# Altium PCB PCBChamberRTDs.PcbDoc (part 1 of 2)
Units mil, origin at the board's own origin, x right, y up, seen from the top; angles counter-clockwise.
Board outline 6299.21 x 4724.41 mil, 2 copper layers (Top Layer, Bottom Layer); 132 components, 182 nets, 689 pads, 214 vias.
Unrouted connection lines stored in the file: 100.
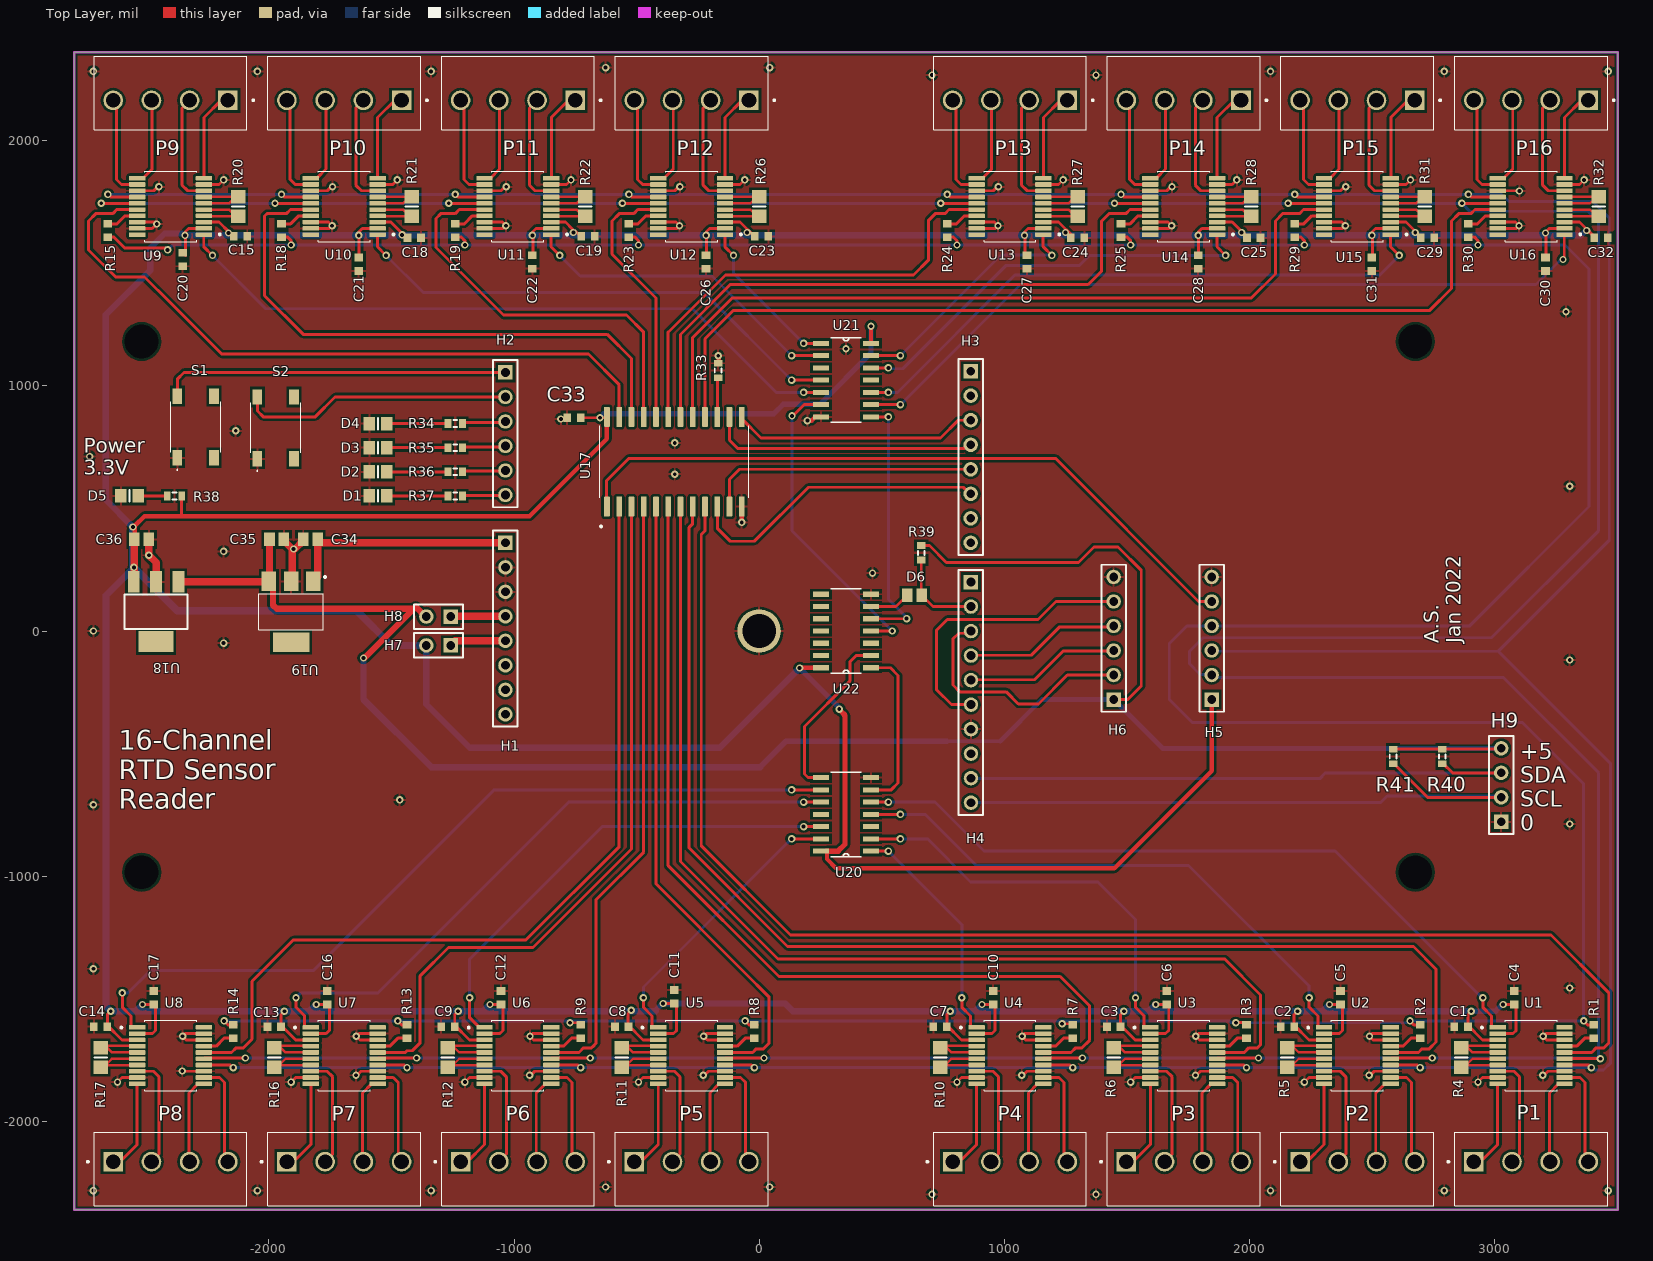
[diagram p0: Top Layer view]
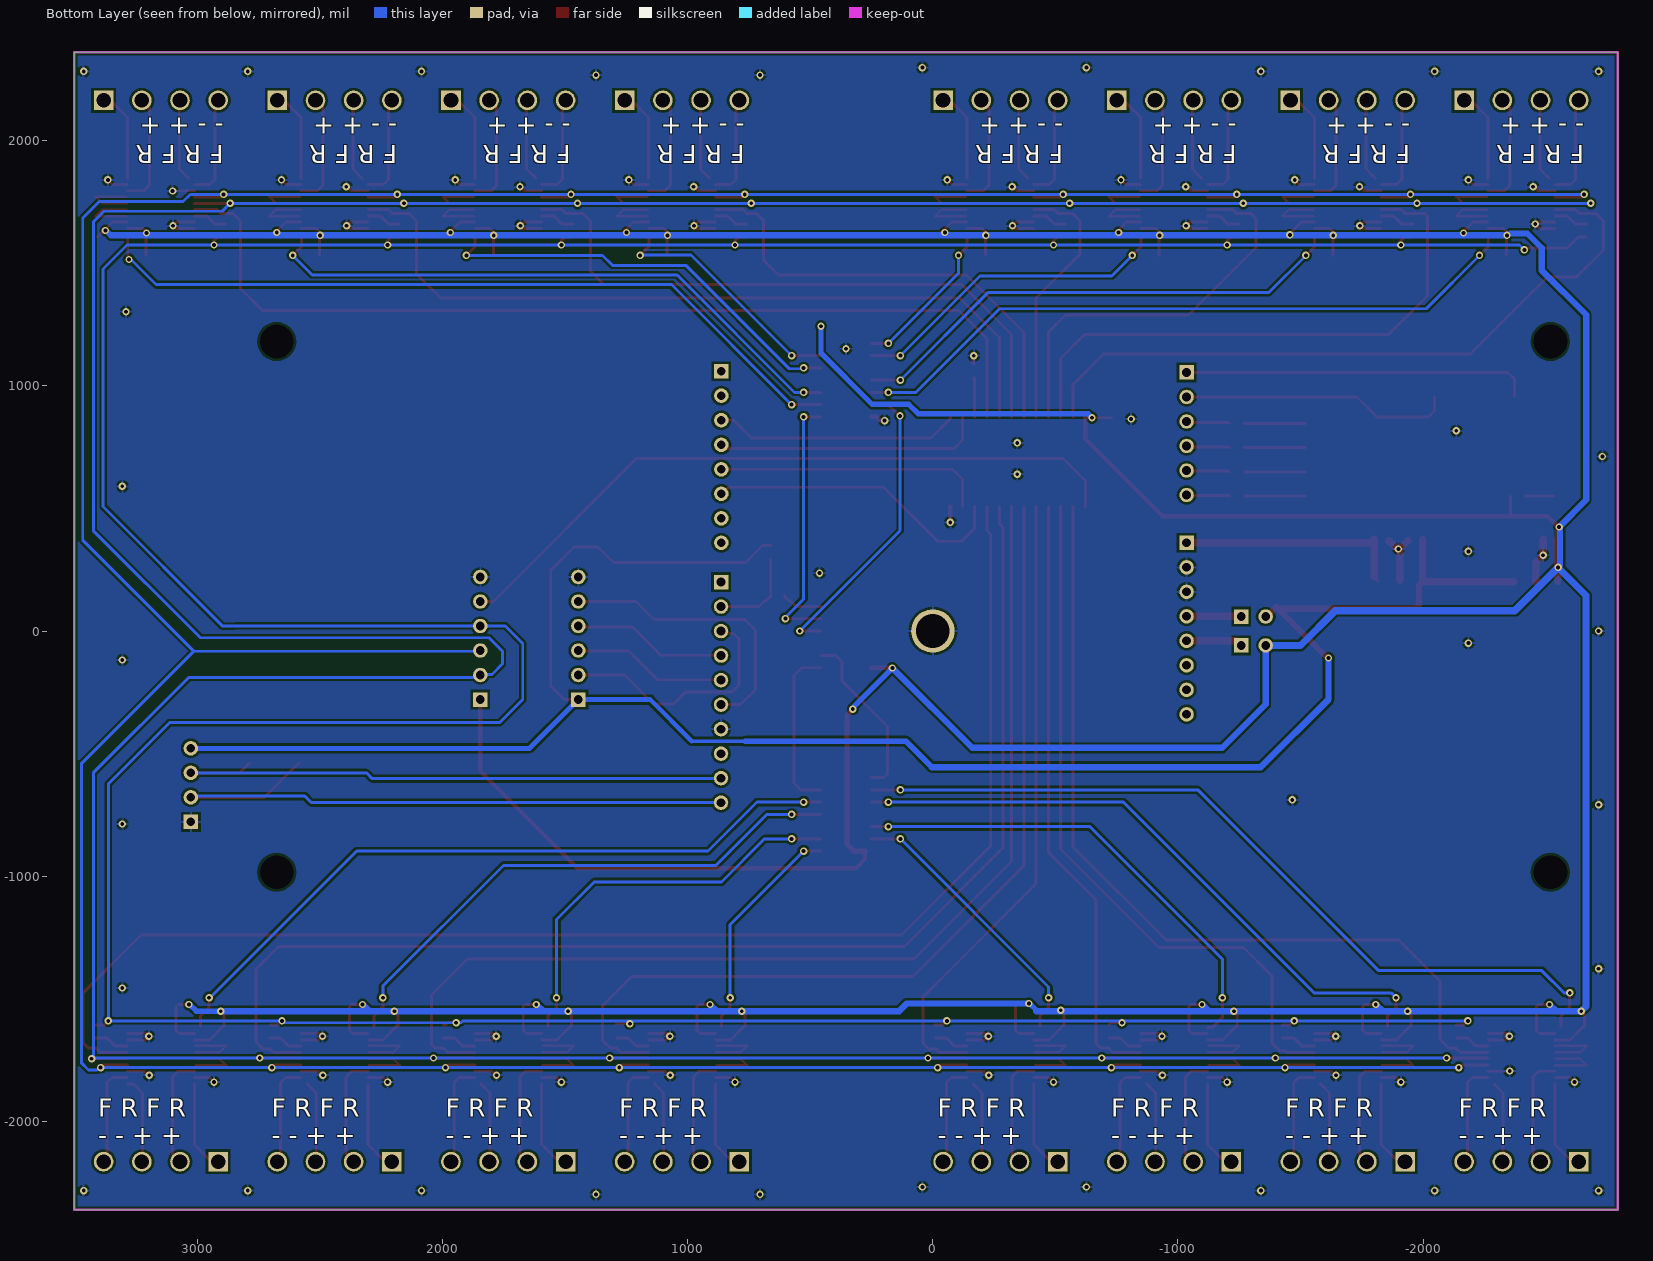
[diagram p1: Bottom Layer view, seen from below]

## Layer stack, top to bottom
Top Solder: solder mask 0.4, Solder Resist, Dk 3.5
Top Layer: signal copper 1.4
Dielectric 1: dielectric 12.6, FR-4, Dk 4.8
Bottom Layer: signal copper 1.4
Bottom Solder: solder mask 0.4, Solder Resist, Dk 3.5

## Board outline
-2795.28,-2362.2 -2795.28,2362.2 3503.94,2362.2 3503.94,-2362.2

## Design rules (kind name [scope] priority, off if disabled: settings)
Clearance [All] p1: gap=10 ignorepadtopadclearanceinfootprint=FALSE except(0: Arc-Hole Track-Hole SMDPad-Hole THPad-Hole Via-Hole Fill-Hole Poly-Hole Region-Hole Text-Hole; 7: Arc-Arc Arc-Track Arc-SMDPad Arc-THPad Track-Track Track-SMDPad Track-THPad SMDPad-SMDPad)
PolygonConnect [All] p1: connectstyle=Relief reliefconductorwidth=10 reliefentries=4 polygonreliefangle="90 Angle" airgapwidth=10
RoutingVias [All] p1: holewidth=28 width=50 viastyle="Through Hole" minholewidth=28 minwidth=50 maxholewidth=28 maxwidth=50
SolderMaskExpansion [All] p1: expansion=4 istentingtop=FALSE
Width [All] p1: maxlimit=30 minlimit=7 preferedwidth=12 minimp=50.000000 maximp=50.000000 favimp=50.000000
30 further rules are at their usual default settings.

## Classes and differential pairs
component class RTDsSheet2: C15 C18 C19 C20 C21 C22 C23 C24 C25 C26 C27 C28 C29 C30 C31 C32 P9 P10 P11 P12 P13 P14 P15 P16 R15 R18 R19 R20 R21 R22 R23 R24 R25 R26 R27 R28 R29 R30 R31 R32 U9 U10 U11 U12 U13 U14 U15 U16 U21
component class RTDsSheet3: C33 C34 C35 C36 D1 D2 D3 D4 D5 D6 H1 H2 H3 H4 H5 H6 H7 H8 H9 R33 R34 R35 R36 R37 R38 R39 R40 R41 S1 S2 U17 U18 U19 U22
component class RTDsSheet1: C1 C2 C3 C4 C5 C6 C7 C8 C9 C10 C11 C12 C13 C14 C16 C17 P1 P2 P3 P4 P5 P6 P7 P8 R1 R2 R3 R4 R5 R6 R7 R8 R9 R10 R11 R12 R13 R14 R16 R17 U1 U2 U3 U4 U5 U6 U7 U8 U20

## Components (designator, comment, footprint, x,y, rotation, side; value= is the part's Value field where it differs from the comment)
C1 "" 1608[0603] 2864.17,-1614.17 r0 top value=0.1uF
C2 "" 1608[0603] 2155.51,-1614.17 r0 top value=0.1uF
C3 "" 1608[0603] 1446.85,-1614.17 r0 top value=0.1uF
C4 "" 1608[0603] 3080.71,-1496.06 r270 top value=0.1uF
C5 "" 1608[0603] 2372.05,-1496.06 r270 top value=0.1uF
C6 "" 1608[0603] 1663.39,-1496.06 r270 top value=0.1uF
C7 "" 1608[0603] 738.19,-1614.17 r0 top value=0.1uF
C8 "" 1608[0603] -561.02,-1614.17 r0 top value=0.1uF
C9 "" 1608[0603] -1269.68,-1614.17 r0 top value=0.1uF
C10 "" 1608[0603] 954.72,-1496.06 r270 top value=0.1uF
C11 "" 1608[0603] -346.46,-1492.13 r270 top value=0.1uF
C12 "" 1608[0603] -1053.15,-1496.06 r270 top value=0.1uF
C13 "" 1608[0603] -1978.35,-1614.17 r0 top value=0.1uF
C14 "" 1608[0603] -2687.01,-1614.17 r0 top value=0.1uF
C15 "" 1608[0603] -2116.14,1610.07 r180 top value=0.1uF
C16 "" 1608[0603] -1761.81,-1496.06 r270 top value=0.1uF
C17 "" 1608[0603] -2470.47,-1496.06 r270 top value=0.1uF
C18 "" 1608[0603] -1407.48,1604.33 r180 top value=0.1uF
C19 "" 1608[0603] -698.82,1610.07 r180 top value=0.1uF
C20 "" 1608[0603] -2352.36,1515.75 r90 top value=0.1uF
C21 "" 1608[0603] -1633.86,1496.06 r90 top value=0.1uF
C22 "" 1608[0603] -925.2,1505.91 r90 top value=0.1uF
C23 "" 1608[0603] 9.84,1610.07 r180 top value=0.1uF
C24 "" 1608[0603] 1299.21,1604.33 r180 top value=0.1uF
C25 "" 1608[0603] 2017.72,1604.33 r180 top value=0.1uF
C26 "" 1608[0603] -216.54,1505.91 r90 top value=0.1uF
C27 "" 1608[0603] 1092.52,1505.91 r90 top value=0.1uF
C28 "" 1608[0603] 1791.34,1505.91 r90 top value=0.1uF
C29 "" 1608[0603] 2726.38,1604.33 r180 top value=0.1uF
C30 "" 1608[0603] 3208.66,1496.06 r90 top value=0.1uF
C31 "" 1608[0603] 2500,1496.06 r90 top value=0.1uF
C32 "" 1608[0603] 3435.04,1604.33 r180 top value=0.1uF
C33 "" 1608[0603] -755.91,870.08 r180 top value=0.1uF
C34 "" C0805 -1830.71,374.02 r0 top value=4.7uF
C35 "" C0805 -1968.5,374.02 r180 top value=4.7uF
C36 "" C0805 -2519.68,374.02 r180 top value=4.7uF
D1 "" 6-0805_N -1555.12,551.18 r180 top
D2 "" 6-0805_N -1555.12,649.61 r180 top
D3 "" 6-0805_N -1555.12,748.03 r180 top
D4 "" 6-0805_N -1555.12,846.46 r180 top
D5 "" 6-0805_N -2568.9,551.18 r180 top
D6 "Diode 1N4001" C0805 633.86,145.67 r0 top
H1 "Header 8" HDR1X8 -1035.24,359.96 r270 top
H2 "PA1" HDR1X6 -1035.24,1054.95 r270 top
H3 "Header 8" HDR1X8 863.31,1059.95 r270 top
H4 "Header 10" HDR1X10 864.17,199.8 r270 top
H5 "PA1" HDR1X6 1846.5,-279.53 r90 top locked
H6 "PA1" HDR1X6 1446.5,-279.53 r90 top locked
H7 "" HDR1X2 -1258.27,-58.83 r180 top
H8 "" HDR1X2 -1258.27,59.06 r180 top
H9 "" HDR1X4 3027.56,-778.74 r90 top
P1 "OSTTE020104" TE_3-641209-4 3149.61,-2165.35 r180 top
P2 "OSTTE020104" TE_3-641209-4 2440.95,-2165.35 r180 top
P3 "OSTTE020104" TE_3-641209-4 1732.28,-2165.35 r180 top
P4 "OSTTE020104" TE_3-641209-4 1023.62,-2165.35 r180 top
P5 "OSTTE020104" TE_3-641209-4 -275.59,-2165.35 r180 top
P6 "OSTTE020104" TE_3-641209-4 -984.25,-2165.35 r180 top
P7 "OSTTE020104" TE_3-641209-4 -1692.91,-2165.35 r180 top
P8 "OSTTE020104" TE_3-641209-4 -2401.57,-2165.35 r180 top
P9 "OSTTE020104" TE_3-641209-4 -2401.57,2165.35 r0 top
P10 "OSTTE020104" TE_3-641209-4 -1692.91,2165.35 r0 top
P11 "OSTTE020104" TE_3-641209-4 -984.25,2165.35 r0 top
P12 "OSTTE020104" TE_3-641209-4 -275.59,2165.35 r0 top
P13 "OSTTE020104" TE_3-641209-4 1023.62,2165.35 r0 top
P14 "OSTTE020104" TE_3-641209-4 1732.28,2165.35 r0 top
P15 "OSTTE020104" TE_3-641209-4 2440.95,2165.35 r0 top
P16 "OSTTE020104" TE_3-641209-4 3149.61,2165.35 r0 top
R1 "" 1608[0603] 3405.51,-1633.86 r90 top value=100R
R2 "" 1608[0603] 2696.85,-1633.86 r90 top value=100R
R3 "" 1608[0603] 1988.19,-1633.86 r90 top value=100R
R4 "" 6-0805_M 2864.17,-1740.16 r90 top value="400 Ohm"
R5 "" 6-0805_M 2155.51,-1740.16 r90 top value="400 Ohm"
R6 "" 6-0805_M 1446.85,-1740.16 r90 top value="400 Ohm"
R7 "" 1608[0603] 1279.53,-1633.86 r90 top value=100R
R8 "" 1608[0603] -19.68,-1633.86 r90 top value=100R
R9 "" 1608[0603] -728.35,-1633.86 r90 top value=100R
R10 "" 6-0805_M 738.19,-1740.16 r90 top value="400 Ohm"
R11 "" 6-0805_M -561.02,-1740.16 r90 top value="400 Ohm"
R12 "" 6-0805_M -1269.68,-1740.16 r90 top value="400 Ohm"
R13 "" 1608[0603] -1437.01,-1633.86 r90 top value=100R
R14 "" 1608[0603] -2145.67,-1633.86 r90 top value=100R
R15 "" 1608[0603] -2657.48,1633.86 r270 top value=100R
R16 "" 6-0805_M -1978.35,-1740.16 r90 top value="400 Ohm"
R17 "" 6-0805_M -2687.01,-1740.16 r90 top value="400 Ohm"
R18 "" 1608[0603] -1948.82,1633.86 r270 top value=100R
R19 "" 1608[0603] -1240.16,1633.86 r270 top value=100R
R20 "" 6-0805_M -2125.98,1732.28 r270 top value="400 Ohm"
R21 "" 6-0805_M -1417.32,1732.28 r270 top value="400 Ohm"
R22 "" 6-0805_M -708.66,1732.28 r270 top value="400 Ohm"
R23 "" 1608[0603] -531.5,1633.86 r270 top value=100R
R24 "" 1608[0603] 767.72,1633.86 r270 top value=100R
R25 "" 1608[0603] 1476.38,1633.86 r270 top value=100R
R26 "" 6-0805_M 0,1732.28 r270 top value="400 Ohm"
R27 "" 6-0805_M 1299.21,1732.28 r270 top value="400 Ohm"
R28 "" 6-0805_M 2007.87,1732.28 r270 top value="400 Ohm"
R29 "" 1608[0603] 2185.04,1633.86 r270 top value=100R
R30 "" 1608[0603] 2893.7,1633.86 r270 top value=100R
R31 "" 6-0805_M 2716.54,1732.28 r270 top value="400 Ohm"
R32 "" 6-0805_M 3425.2,1732.28 r270 top value="400 Ohm"
R33 "" J1-0603 -167.32,1062.99 r90 top value=100R
R34 "" J1-0603 -1240.16,846.46 r180 top value=100R
R35 "" J1-0603 -1240.16,748.03 r180 top value=100R
R36 "" J1-0603 -1240.16,649.61 r180 top value=100R
R37 "" J1-0603 -1240.16,551.18 r180 top value=100R
R38 "" J1-0603 -2385.83,551.18 r180 top value=100R
R39 "" J1-0603 661.42,318.9 r270 top value=4.7K
R40 "" J1-0603 2787.4,-511.81 r270 top value=4.7K
R41 "" J1-0603 2586.61,-511.81 r270 top value=4.7K
S1 "" PTS525SM08SMTR2LFS -2299.21,807.09 r90 top
S2 "" PTS525SM08SMTR2LFS -1972.44,803.15 r90 top
U1 "MAX31865AAP" SOP65P777X199-20N 3149.61,-1732.28 r0 top
U2 "MAX31865AAP" SOP65P777X199-20N 2440.95,-1732.28 r0 top
U3 "MAX31865AAP" SOP65P777X199-20N 1732.28,-1732.28 r0 top
U4 "MAX31865AAP" SOP65P777X199-20N 1023.62,-1732.28 r0 top
U5 "MAX31865AAP" SOP65P777X199-20N -275.59,-1732.28 r0 top
U6 "MAX31865AAP" SOP65P777X199-20N -984.25,-1732.28 r0 top
U7 "MAX31865AAP" SOP65P777X199-20N -1692.91,-1732.28 r0 top
U8 "MAX31865AAP" SOP65P777X199-20N -2401.57,-1732.28 r0 top
U9 "MAX31865AAP" SOP65P777X199-20N -2401.57,1732.28 r180 top
U10 "MAX31865AAP" SOP65P777X199-20N -1692.91,1732.28 r180 top
U11 "MAX31865AAP" SOP65P777X199-20N -984.25,1732.28 r180 top
U12 "MAX31865AAP" SOP65P777X199-20N -275.59,1732.28 r180 top
U13 "MAX31865AAP" SOP65P777X199-20N 1023.62,1732.28 r180 top
U14 "MAX31865AAP" SOP65P777X199-20N 1732.28,1732.28 r180 top
U15 "MAX31865AAP" SOP65P777X199-20N 2440.95,1732.28 r180 top
U16 "MAX31865AAP" SOP65P777X199-20N 3149.61,1732.28 r180 top
U17 "CD74HC4067M96" SOIC127P1030X265-24N -346.26,690.55 r90 top
U18 "AP2114H-3.3TRG1" SOT230P700X180-4N#1 -2460.63,78.74 r180 top
U19 "LT1129IST-5#PBF" SOT230P700X180-4N#2 -1909.45,78.74 r180 top
U20 "74HC21D,653" SOIC127P600X175-14N 354.33,-748.03 r180 top
U21 "74HC21D,653" SOIC127P600X175-14N 354.33,1023.62 r0 top
U22 "74HC21D,653" SOIC127P600X175-14N 354.33,0 r180 top

## Footprints (in the part's own frame and the unit in brackets; to place one, negate y for a bottom-side part, rotate by r counter-clockwise, add the part's x,y. Pads: shape width x height; smd on the part's side, far side on the other; paste and mask are expansions set on the pad)
6-0805_M [mm] "Chip Resistor, Body 2.0x1.2mm, IPC Low Density"
  rect 1.4x1.5 smd: 1(-1,0) 2(1,0)
  silkscreen extent 0,-0.65 0,0.65, body extent -1.07,-0.7 1.07,0.7, height 0.7
6-0805_N [mm] "Chip Resistor, Body 2.0x1.2mm, IPC Medium Density"
  rect 1.2x1.4 smd: 1(-0.9,0) 2(0.9,0)
  silkscreen extent 0,-0.6 0,0.6, body extent -1.07,-0.7 1.07,0.7, height 0.7
1608[0603] [mm] "Chip Capacitor, Body 1.6x0.8mm, IPC High Density"
  rect 0.8x0.9 smd: 1(-0.7,0) 2(0.7,0)
  body extent -0.87,-0.48 0.87,0.48, height 1.3
C0805 [mm] "Chip Capacitor, Body 2.0x1.3mm, IPC High Density"
  rect 1.1x1.4 smd: 1(-0.75,0) 2(0.75,0)
  body extent -1.1,-0.72 1.1,0.72, height 1.4
HDR1X2 [mm] "Connector; Header; 2 Position"
  rect 1.5x1.5 hole 0.9: 1(0,0)
  round 1.5 hole 0.9: 2(2.54,0)
  silkscreen extent -1.27,-1.27 3.81,1.27
HDR1X4 [mm] "Connector; Header; 4 Position"
  rect 1.5x1.5 hole 0.9: 1(0,0)
  round 1.5 hole 0.9: 2(2.54,0) 3(5.08,0) 4(7.62,0)
  silkscreen extent -1.27,-1.27 8.89,1.27
HDR1X6 [mm] "Connector; Header; 6 Position"
  rect 1.5x1.5 hole 0.9: 1(0,0)
  round 1.5 hole 0.9: 2(2.54,0) 3(5.08,0) 4(7.62,0) 5(10.16,0) 6(12.7,0)
  silkscreen extent -1.27,-1.27 13.97,1.27
HDR1X8 [mm] "Connector; Header; 8 Position"
  rect 1.5x1.5 hole 0.9: 1(0,0)
  round 1.5 hole 0.9: 2(2.54,0) 3(5.08,0) 4(7.62,0) 5(10.16,0) 6(12.7,0) 7(15.24,0) 8(17.78,0)
  silkscreen extent -1.27,-1.27 19.05,1.27
HDR1X10 [mm] "Connector; Header; 10 Position"
  rect 1.5x1.5 hole 0.9: 1(0,0)
  round 1.5 hole 0.9: 2(2.54,0) 3(5.08,0) 4(7.62,0) 5(10.16,0) 6(12.7,0) 7(15.24,0) 8(17.78,0) 9(20.32,0) 10(22.86,0)
  silkscreen extent -1.27,-1.27 24.13,1.27
J1-0603 [mm] "Chip Resistor, Body 1.6x0.8mm, IPC High Density"
  rect 0.7x0.9 smd: 1(-0.75,0) 2(0.75,0)
  silkscreen extent -0.2,-0.35 0.2,0.35, body extent -0.85,-0.48 0.85,0.48, height 0.9
PTS525SM08SMTR2LFS [mm]
  rect 1.6x1 smd: 1(-2.55,1.9) 2(3.85,1.9) 3(-2.55,-1.9) 4(3.85,-1.9)
  silkscreen extent -3.85,-2.6 3.25,2.6
SOIC127P600X175-14N [mil]
  rect 67x21 smd: 1(-102,150) 2(-102,100) 3(-102,50) 4(-102,0) 5(-102,-50) 6(-102,-100) 7(-102,-150) 8(102,-150) 9(102,-100) 10(102,-50) 11(102,0) 12(102,50) 13(102,100) 14(102,150)
  silkscreen extent -63,-172 63,172
SOIC127P1030X265-24N [mm]
  rrect25% 2.06x0.6 smd: 1(-4.64,6.985) 2(-4.64,5.715) 3(-4.64,4.445) 4(-4.64,3.175) 5(-4.64,1.905) 6(-4.64,0.635) 7(-4.64,-0.635) 8(-4.64,-1.905) 9(-4.64,-3.175) 10(-4.64,-4.445) 11(-4.64,-5.715) 12(-4.64,-6.985) 13(4.64,-6.985) 14(4.64,-5.715) 15(4.64,-4.445) 16(4.64,-3.175) 17(4.64,-1.905) 18(4.64,-0.635) 19(4.64,0.635) 20(4.64,1.905) 21(4.64,3.175) 22(4.64,4.445) 23(4.64,5.715) 24(4.64,6.985)
  silkscreen extent -6.8,-7.7 3.75,7.7, body extent -5.15,-7.7 5.15,7.7, height 2.65
SOP65P777X199-20N [mm]
  rrect25% 1.7x0.48 smd: 1(-3.46,2.925) 2(-3.46,2.275) 3(-3.46,1.625) 4(-3.46,0.975) 5(-3.46,0.325) 6(-3.46,-0.325) 7(-3.46,-0.975) 8(-3.46,-1.625) 9(-3.46,-2.275) 10(-3.46,-2.925) 11(3.46,-2.925) 12(3.46,-2.275) 13(3.46,-1.625) 14(3.46,-0.975) 15(3.46,-0.325) 16(3.46,0.325) 17(3.46,0.975) 18(3.46,1.625) 19(3.46,2.275) 20(3.46,2.925)
  silkscreen extent -5.2,-3.67 2.69,3.67, body extent -3.89,-3.6 3.89,3.6, height 1.99
SOT230P700X180-4N#1 [mil]
  rect 48x88 smd: 1(-91,-122) 2(0,-122) 3(91,-122)
  rect 141.73x86.61 smd: 4(0,122.01)
  silkscreen extent -129,-70 129,70
SOT230P700X180-4N#2 [mil]
  rect 59.06x78.74 smd: 1(-90.55,-124.02) 2(0,-124.02) 3(90.55,-124.02)
  rect 149.61x78.74 smd: 4(0,124.02)
  silkscreen extent -142,-146 132,73, body extent -128,-138 128,138, height 71
TE_3-641209-4 [mil]
  round 80 hole 59.84: 1(-233.86,0) 2(-77.95,0) 3(77.95,0)
  rect 80x80 hole 59.84: 4(233.86,0)
  silkscreen extent -312,-120 341,180

## Part data
C1 C2 C3 C4 C5 C6 C7 C8 C9 C10 C11 C12 C13 C14 C15 C16 C17 C18 C19 C20 C21 C22 C23 C24 C25 C26 C27 C28 C29 C30 C31 C32 C33 C34 C35 C36: library part "Cap Semi", "Capacitor (Semiconductor SIM Model)", LatestRevisionDate=29-May-2009, LatestRevisionNote="IPC-7351 Footprint Added.", PackageDescription="Chip Capacitor", PackageReference=C1206, Published=8-Jun-2000, Publisher="Altium Limited"
D1 D2 D3 D4 D5: library part LED3, "Typical BLUE SiC LED", DatasheetVersion=16-Apr-2002, LatestRevisionDate=17-Dec-2003, LatestRevisionNote="PCB Footprint replaced.", PackageDescription="SM LED; 2 C-Bend Leads; Body 3.5 x 2.8 x 1.9 mm, inc leads (LxWxH typ)", PackageReference=3.5X2.8X1.9, PackageVersion=16-Apr-2002, Published=8-Jun-2000, Publisher="Altium Limited"
D6: "1 Amp General Purpose Rectifier", Code_JEDEC=DO-204-AL, ComponentLink1Description="Manufacturer Link", ComponentLink1URL=http://www.fairchildsemi.com/, ComponentLink2Description=Datasheet, ComponentLink2URL=http://www.fairchildsemi.com/ds/1N%2F1N4001.pdf, DatasheetVersion=1998, LatestRevisionDate=17-Jul-2002, LatestRevisionNote="Re-released for DXP Platform.", PackageDescription="Diode, Axial; Body 5.2 x 2.7 mm (LxDia. max), Lead Dia. 0.86 mm (max)", PackageReference=DO-41, PackageVersion=Aug-1999, Published=8-Jun-2000, Publisher="Altium Limited"
H1 H3: "Header, 8-Pin", LatestRevisionDate=17-Jul-2002, LatestRevisionNote="Re-released for DXP Platform.", Publisher="Altium Limited"
H2 H5 H6: library part "Header 6", "Header, 6-Pin", LatestRevisionDate=17-Jul-2002, LatestRevisionNote="Re-released for DXP Platform.", Publisher="Altium Limited"
H4: "Header, 10-Pin", LatestRevisionDate=17-Jul-2002, LatestRevisionNote="Re-released for DXP Platform.", Publisher="Altium Limited"
H7 H8: library part "Header 2", "Header, 2-Pin", LatestRevisionDate=17-Jul-2002, LatestRevisionNote="Re-released for DXP Platform.", Publisher="Altium Limited"
H9: library part "Header 4", "Header, 4-Pin", LatestRevisionDate=17-Jul-2002, LatestRevisionNote="Re-released for DXP Platform.", Publisher="Altium Limited"
P1 P2 P3 P4 P5 P6 P7 P8 P9 P10 P11 P12 P13 P14 P15 P16: "Terminal Block 3.5mm 2pos Pcb", Package=None, Availability=Unavailable, MF="{'manufacturer': u'On Shore'}", MP=OSTTE020104, Price=None
R1 R2 R3 R4 R5 R6 R7 R8 R9 R10 R11 R12 R13 R14 R15 R16 R17 R18 R19 R20 R21 R22 R23 R24 R25 R26 R27 R28 R29 R30 R31 R32: library part "Res Semi", "Semiconductor Resistor", LatestRevisionDate=17-Jul-2002, LatestRevisionNote="Re-released for DXP Platform.", PackageDescription="Axial Device, Thru-Hole; 2 Leads; 0.5 in Pin Spacing", PackageReference=AXIAL-0.5, Published=8-Jun-2000, Publisher="Altium Limited"
R33 R34 R35 R36 R37 R38 R39 R40 R41: library part Res3, "Resistor", LatestRevisionDate=29-May-2009, LatestRevisionNote="IPC-7351 Footprint Added.", PackageDescription="Chip Resistor", PackageReference=J1-0603, Published=8-Jun-2000, Publisher="Altium Limited"
S1 S2: library part SW-PB, "Switch", LatestRevisionDate=17-Jul-2002, LatestRevisionNote="Re-released for DXP Platform.", PackageDescription="Switch; 2 Leads", PackageReference=SPST-2, Published=24-Mar-1999, Publisher="Altium Limited"
U1 U2 U3 U4 U5 U6 U7 U8 U9 U10 U11 U12 U13 U14 U15 U16: "Rtd To Digital Converter In Ssop Tr", Package=None, Availability=Unavailable, MF="{'manufacturer': u'Maxim Integrated'}", MP=MAX31865AAP, Price=None
U17 U18 U19: Package=None, Availability=Unavailable, Price=None
  U17: MF="{'manufacturer': u'Texas Instruments'}", MP=CD74HC4067M96
  U18: MF="{'manufacturer': u'Diodes Inc.'}", MP=AP2114H-3.3TRG1
  U19: MF="{'manufacturer': u'Analog Devices'}", MP=LT1129IST-5#PBF
U20 U21 U22: "Dual 4-input AND gate", Package=None, Availability=Unavailable, MF="{'manufacturer': u'Nexperia USA'}", MP=74HC21D,653, Price=None

## Free pads (board coordinates)
  round 0 hole 137.8: 10(-2519.68,-984.25) 10(-2519.68,1181.1) 10(2677.17,-984.25) 10(2677.17,1181.1)
  round 177.17 hole 137.8: 10(0,0)

## Via types
v1: diameter 30, hole 15.75, Top Layer to Bottom Layer, tented both sides, 214 vias

## Nets (pads, with @x,y where several pads share a name; then routed paths per layer and width w, separated by ;. In a path a pad name is that pad's centre, name@x,y a point inside that pad or via, vN(x,y) a via of type N, cw(c..) or ccw(c..) an arc to the next point about the centre after c; other vN are vias at no path point)
ARD_V3.3: H1.5 H7.1 | length 230.8
  Top Layer w12: H7.1@-1258.27,-58.83 H7.1@-1239.48,-40.04
  Top Layer w30: H7.1@-1239.48,-40.04 H1.5@-1035.24,-40.04
ARD_VDD: H1.4 H8.1 | length 223.4
  Top Layer w12: H8.1@-1258.27,59.06 H8.1@-1257.36,59.96
  Top Layer w30: H8.1@-1257.36,59.96 H1.4@-1035.24,59.96
ARD_VIN: C34.2 H1.1 U19.1 | length 950.4
  Top Layer w12: U19.1@-1818.9,202.76 U19.1@-1801.18,220.47 ; C34.2@-1801.18,374.02 C34.2@-1787.13,359.96
  Top Layer w30: U19.1@-1801.18,220.47 C34.2@-1801.18,374.02 ; C34.2@-1787.13,359.96 H1.1@-1035.24,359.96
CS: H5.5 U17.1 | length 2854.7
  Top Layer w12: U17.1@-621.26,507.87 -622.05,508.66 -622.05,614.17 -531.5,704.72 1208.66,704.72 1792.91,120.47 H5.5@1846.5,120.47
CS-0: U1.16 U17.9 | length 5742.8
  Top Layer w12: U17.9@-221.26,507.87 -221.26,408.66 -236.22,393.7 -236.22,-875.98 127.95,-1240.16 3230.32,-1240.16 3466.54,-1476.38 3466.54,-1681.1 3446.85,-1700.79 3415.35,-1700.79 3396.65,-1719.49 U1.16@3285.83,-1719.49
CS-1: U2.16 U17.8 | length 5150.9
  Top Layer w12: U17.8@-271.26,507.87 -271.26,437.4 -285.43,423.23 -285.43,-885.83 116.14,-1287.4 2669.29,-1287.4 2761.81,-1379.92 2761.81,-1677.17 2734.25,-1704.72 2704.72,-1704.72 2689.96,-1719.49 U2.16@2577.17,-1719.49
CS-2: U3.16 U17.7 | length 4434.7
  Top Layer w12: U17.7@-321.26,507.87 -321.26,-940.55 76.77,-1338.58 1899.65,-1338.58 2045.78,-1484.71 2045.78,-1688.48 2033.46,-1700.79 1998.03,-1700.79 1979.33,-1719.49 U3.16@1868.5,-1719.49
CS-3: U4.16 U17.6 | length 3771.1
  Top Layer w12: U17.6@-371.26,507.87 -371.26,-957.48 80.71,-1409.45 1228.35,-1409.45 1348.43,-1529.53 1348.43,-1669.29 1316.93,-1700.79 1291.34,-1700.79 1272.64,-1719.49 U4.16@1159.84,-1719.49
CS-4: U5.16 U17.5 | length 2575.6
  Top Layer w12: U17.5@-421.26,507.87 -421.26,-1031.5 -61.6,-1391.16 39.37,-1492.13 39.37,-1683.07 17.72,-1704.72 -11.81,-1704.72 -26.57,-1719.49 U5.16@-139.37,-1719.49
CS-5: U6.16 U17.4 | length 2468.4
  Top Layer w12: U6.16@-848.03,-1719.49 -735.24,-1719.49 -716.53,-1700.79 -684.19,-1700.79 -677.17,-1693.76 -665.35,-1681.95 -665.35,-1096.46 -471.26,-902.36 U17.4@-471.26,507.87
CS-6: U7.16 U17.3 | length 2936.7
  Top Layer w12: U7.16@-1556.69,-1719.49 -1443.9,-1719.49 -1437.01,-1712.6 -1415.49,-1712.6 -1383.1,-1680.21 -1383.1,-1406.73 -1267.72,-1291.34 -923.23,-1291.34 -521.26,-889.37 U17.3@-521.26,507.87
CS-7: U8.16 U17.2 | length 3568.3
  Top Layer w12: U8.16@-2265.35,-1719.49 -2152.56,-1719.49 -2133.86,-1700.79 -2104.33,-1700.79 -2068.9,-1665.35 -2068.9,-1429.13 -1899.61,-1259.84 -950.79,-1259.84 -571.26,-880.31 U17.2@-571.26,507.87
CS-8: U9.16 U17.23 | length 2859.9
  Top Layer w12: U9.16@-2537.8,1719.49 -2621.06,1719.49 -2637.8,1702.76 -2706.69,1702.76 -2736.22,1673.23 -2736.22,1555.12 -2625.49,1444.39 -2507.38,1444.39 -2404.04,1341.04 -2192.91,1129.92 -696.85,1129.92 -571.26,1004.33 U17.23@-571.26,873.23
CS-9: U10.16 U17.22 | length 2365.6
  Top Layer w12: U10.16@-1829.13,1719.49 -1912.4,1719.49 -1929.13,1702.76 -2007.87,1702.76 -2017.72,1692.91 -2017.72,1368.11 -1860.24,1210.63 -620.08,1210.63 -521.26,1111.81 U17.22@-521.26,873.23
CS-10: U11.16 U17.21 | length 1668.5
  Top Layer w12: U11.16@-1120.47,1719.49 -1223.42,1719.49 -1240.16,1702.76 -1299.21,1702.76 -1318.9,1683.07 -1318.9,1564.96 -1043.31,1289.37 -541.34,1289.37 -471.26,1219.29 U17.21@-471.26,873.23
CS-11: U12.16 U17.20 | length 1081.9
  Top Layer w12: U17.20@-421.26,873.23 -421.26,1358.27 -600.39,1537.4 -600.39,1673.23 -570.87,1702.76 -511.81,1702.76 -495.08,1719.49 U12.16@-411.81,1719.49
CS-12: U13.16 U17.19 | length 1906
  Top Layer w12: U17.19@-371.26,873.23 -371.26,1220.47 ; -370.08,1220.47 -137.8,1452.76 629.92,1452.76 691.73,1514.57 691.73,1675.98 718.5,1702.76 757.87,1702.76 774.61,1719.49 U13.16@887.4,1719.49
CS-13: U14.16 U17.18 | length 2585.2
  Top Layer w12: U17.18@-321.26,873.23 -321.26,1210.24 -118.11,1413.39 1342.52,1413.39 1397.64,1468.5 1397.64,1673.23 1427.17,1702.76 1496.06,1702.76 1512.8,1719.49 U14.16@1596.06,1719.49
CS-14: U15.16 U17.17 | length 3243.2
  Top Layer w12: U17.17@-271.26,873.23 -271.26,1197.24 -110.24,1358.27 2007.87,1358.27 2106.3,1456.69 2106.3,1673.23 2135.83,1702.76 2204.72,1702.76 2221.46,1719.49 U15.16@2304.72,1719.49
CS-15: U16.16 U17.16 | length 3933.4
  Top Layer w12: U17.16@-221.26,873.23 -221.26,1192.13 -106.3,1307.09 2734.25,1307.09 2824.8,1397.64 2824.8,1673.23 2854.33,1702.76 2903.54,1702.76 2920.28,1719.49 U16.16@3013.39,1719.49
CS-H: H4.6 H6.5 | length 1179.1
  Top Layer w12: H4.6@864.17,-300.2 784.45,-300.2 724.41,-240.16 724.41,3.94 767.72,47.24 1137.8,47.24 1211.02,120.47 H6.5@1446.5,120.47
DRDY: D6.2 H4.2 R39.2 | length 367.8
  Top Layer w12: R39.2@661.42,289.37 661.42,141.73 679.04,124.11 684.95,124.11 709.25,99.8 H4.2@864.17,99.8
DRDY-0: U1.1 U20.5 | length 2959.4
  Top Layer w12: U20.5@456.33,-698.03 v1(527.17,-698.03) v1@527.56,-697.64 ; v1(2952.76,-1496.06) 2952.76,-1535.43 2988.28,-1570.96 U1.1@2988.28,-1613.68
  Bottom Layer w12: v1(527.17,-698.03) 717.72,-698.03 917.32,-897.64 2350.39,-897.64 v1@2951.3,-1498.55
DRDY-0-3: U20.6 U22.1 | length 684.9
  Top Layer w12: U20.6@456.33,-648.03 539.37,-648.03 566.93,-620.47 566.93,-181.1 535.83,-150 U22.1@456.33,-150
DRDY-1: U2.1 U20.4 | length 2261
  Top Layer w12: U20.4@456.33,-748.03 v1(576.38,-748.03) v1@578.74,-750.39 ; v1(2244.09,-1496.06) 2244.09,-1535.43 2279.62,-1570.96 U2.1@2279.62,-1613.68
  Bottom Layer w12: v1(576.38,-748.03) 677.17,-748.03 885.83,-956.69 1751.97,-956.69 2244.09,-1448.82 v1(2244.09,-1496.06)
DRDY-2: U3.1 U20.2 | length 1670
  Top Layer w12: U20.2@456.33,-848.03 v1(576.38,-848.03) v1@578.74,-850.39 ; v1(1535.43,-1496.06) 1535.43,-1535.43 1570.96,-1570.96 U3.1@1570.96,-1613.68
  Bottom Layer w12: v1(576.38,-848.03) 686.61,-848.03 862.2,-1023.62 1381.89,-1023.62 1535.43,-1177.17 v1(1535.43,-1496.06)
DRDY-3: U4.1 U20.1 | length 925.9
  Top Layer w12: U20.1@456.33,-898.03 v1(527.17,-898.03) v1@527.56,-897.64 ; v1(826.77,-1496.06) 826.77,-1535.43 862.3,-1570.96 U4.1@862.3,-1613.68
  Bottom Layer w12: v1(527.17,-898.03) 826.77,-1197.64 v1(826.77,-1496.06)
DRDY-4: U5.1 U20.13 | length 1154.2
  Top Layer w12: v1(-472.44,-1496.06) -472.44,-1535.43 -436.91,-1570.96 U5.1@-436.91,-1613.68 ; v1@129.92,-845.67 v1(132.28,-848.03) U20.13@252.33,-848.03
  Bottom Layer w12: v1(-472.44,-1496.06) -472.44,-1452.76 v1(132.28,-848.03)
DRDY-4-7: U20.8 U22.2 | length 704.7
  Top Layer w12: U20.8@252.33,-598.03 199.16,-598.03 185.04,-583.92 185.04,-389.76 370.08,-204.72 370.08,-125.98 396.06,-100 U22.2@456.33,-100
DRDY-5: U6.1 U20.12 | length 1974.2
  Top Layer w12: v1(-1181.1,-1496.06) -1181.1,-1578.15 -1142.13,-1617.13 U6.1@-1120.47,-1617.13 ; v1@181.1,-798.43 v1(181.5,-798.03) U20.12@252.33,-798.03
  Bottom Layer w12: v1(-1181.1,-1496.06) -1181.1,-1338.58 -640.55,-798.03 v1(181.5,-798.03)
DRDY-6: U7.1 U20.10 | length 2605.5
  Top Layer w12: v1(-1889.76,-1496.06) -1889.76,-1535.43 -1854.24,-1570.96 U7.1@-1854.24,-1613.68 ; v1@181.1,-698.43 v1(181.5,-698.03) U20.10@252.33,-698.03
  Bottom Layer w12: v1(-1889.76,-1496.06) -1870.08,-1476.38 -1555.12,-1476.38 -776.77,-698.03 v1(181.5,-698.03)
DRDY-7: U8.1 U20.9 | length 3349.2
  Top Layer w12: v1(-2598.43,-1476.38) -2598.43,-1535.43 -2562.9,-1570.96 U8.1@-2562.9,-1613.68 ; v1@129.92,-645.67 v1(132.28,-648.03) U20.9@252.33,-648.03
  Bottom Layer w12: v1(-2598.43,-1476.38) -2574.8,-1476.38 -2484.25,-1385.83 -1818.9,-1385.83 -1081.1,-648.03 v1(132.28,-648.03)
DRDY-8: U9.1 U21.5 | length 2808
  Top Layer w12: U9.1@-2266.24,1610.72 -2266.24,1568.01 v1(-2230.71,1532.48) ; v1@181.1,973.23 v1(181.5,973.62) U21.5@252.33,973.62
  Bottom Layer w12: v1(-2230.71,1532.48) -2013.19,1314.96 -271.65,1314.96 69.69,973.62 v1(181.5,973.62)
DRDY-8-11: U21.6 U22.4 | length 1271.9
  Top Layer w12: v1(133.86,877.95) 137.8,877.95 183.46,923.62 U21.6@252.33,923.62 ; U22.4@456.33,0 v1(543.31,0)
  Bottom Layer w12: v1(133.86,877.95) 133.86,409.45 v1(543.31,0)
DRDY-9: U10.1 U21.4 | length 2081.5
  Top Layer w12: U10.1@-1557.57,1610.72 -1557.57,1568.01 v1(-1522.05,1532.48) ; v1@129.92,1025.98 v1(132.28,1023.62) U21.4@252.33,1023.62
  Bottom Layer w12: v1(-1522.05,1532.48) -1369.88,1380.31 -224.41,1380.31 v1(132.28,1023.62)
DRDY-10: U11.1 U21.2 | length 1331.4
  Top Layer w12: U11.1@-848.91,1610.72 -848.91,1568.01 v1(-813.39,1532.48) ; v1@129.92,1125.98 v1(132.28,1123.62) U21.2@252.33,1123.62
  Bottom Layer w12: v1(-813.39,1532.48) -729.72,1448.82 -192.91,1448.82 v1(132.28,1123.62)
DRDY-11: U12.1 U21.1 | length 641.8
  Top Layer w12: U12.1@-140.25,1610.72 -140.25,1568.01 v1(-104.72,1532.48) ; v1@181.1,1173.23 v1(181.5,1173.62) U21.1@252.33,1173.62
  Bottom Layer w12: v1(-104.72,1532.48) -104.72,1459.84 v1(181.5,1173.62)
DRDY-12: U13.1 U21.13 | length 1005.4
  Top Layer w12: U21.13@456.33,1123.62 v1(576.38,1123.62) v1@578.74,1121.26 ; U13.1@1158.96,1610.72 1158.96,1568.01 v1(1194.49,1532.48)
  Bottom Layer w12: v1(576.38,1123.62) 987.16,1534.4 1192.57,1534.4 v1(1194.49,1532.48)
DRDY-12-15: U21.8 U22.5 | length 1067.6
  Top Layer w12: U22.5@456.33,50 601.18,50 v1@602.36,51.18 ; U21.8@456.33,873.62 v1(527.17,873.62) v1@527.56,874.02
  Bottom Layer w12: v1(527.17,873.62) 527.17,130.32 v1@602.36,55.12
  other v1: 601.77,50.59
DRDY-13: U14.1 U21.12 | length 1733.3
  Top Layer w12: U21.12@456.33,1073.62 v1(527.17,1073.62) v1@527.56,1074.02 ; U14.1@1867.62,1610.72 1867.62,1568.01 v1(1903.15,1532.48)
  Bottom Layer w12: v1(527.17,1073.62) 530.61,1070.18 585.93,1070.18 1007.87,1492.13 1307.09,1492.13 1347.44,1532.48 v1(1903.15,1532.48)
DRDY-14: U15.1 U21.10 | length 2480.5
  Top Layer w12: U21.10@456.33,973.62 v1(527.17,973.62) v1@527.56,974.02 ; U15.1@2576.28,1610.72 2576.28,1568.01 v1(2611.81,1532.48)
  Bottom Layer w12: v1(527.17,973.62) 564.17,973.62 1043.31,1452.76 2532.09,1452.76 v1(2611.81,1532.48)
DRDY-15: U16.1 U21.9 | length 3164.3
  Top Layer w12: U21.9@456.33,923.62 v1(576.38,923.62) v1@578.74,921.26 ; v1(3279.53,1515.75) 3284.95,1521.17 U16.1@3284.95,1610.72
  Bottom Layer w12: v1(576.38,923.62) 1066.14,1413.39 ; 1070.87,1413.39 3169.29,1413.39 3271.65,1515.75 v1(3279.53,1515.75)
GND: C1.1 C2.1 C3.1 C4.1 C5.1 C6.1 C7.1 C8.1 C9.1 C10.1 C11.1 C12.1 C13.1 C14.1 C15.1 C16.1 C17.1 C18.1 C19.1 C20.1 C21.1 C22.1 C23.1 C24.1 C25.1 C26.1 C27.1 C28.1 C29.1 C30.1 C31.1 C32.1 C33.2 C34.1 C35.1 C36.1 D1.2 D2.2 D3.2 D4.2 D5.2 H1.2 H1.3 H4.7 H5.6 H6.6 H9.1 pad.10@0,0 R33.2 S1.1 S2.1 U1.9 U1.13 U1.18 U1.19 U2.9 U2.13 U2.18 U2.19 U3.9 U3.13 U3.18 U3.19 U4.9 U4.13 U4.18 U4.19 U5.9 U5.13 U5.18 U5.19 U6.9 U6.13 U6.18 U6.19 U7.9 U7.13 U7.18 U7.19 U8.9 U8.13 U8.18 U8.19 U9.9 U9.13 U9.18 U9.19 U10.9 U10.13 U10.18 U10.19 U11.9 U11.13 U11.18 U11.19 U12.9 U12.13 U12.18 U12.19 U13.9 U13.13 U13.18 U13.19 U14.9 U14.13 U14.18 U14.19 U15.9 U15.13 U15.18 U15.19 U16.9 U16.13 U16.18 U16.19 U17.12 U18.2 U19.2 U20.7 U21.7 U22.7 | length 6444.4
  Top Layer w12: v1(-2618.11,-1840.55) -2599.41,-1821.85 U8.9@-2537.8,-1821.85 ; U9.19@-2537.8,1642.72 -2476.38,1642.72 v1(-2458.17,1660.93) -2465.55,1668.31 U9.18@-2537.8,1668.31 ; U9.13@-2537.8,1796.26 -2470.44,1796.26 -2454.2,1812.5 v1(-2449.33,1812.5) ; v1@-2352.36,-1791.34 -2347.44,-1796.26 U8.13@-2265.35,-1796.26 ; U8.18@-2265.35,-1668.31 -2337.6,-1668.31 v1(-2352.36,-1653.54) -2341.54,-1642.72 U8.19@-2265.35,-1642.72 ; U9.9@-2265.35,1821.85 -2203.74,1821.85 v1(-2185.04,1840.55) ; C35.1@-1938.98,368.11 C35.1@-1938.98,374.02 ; v1(-1909.45,-1840.55) -1890.75,-1821.85 U7.9@-1829.13,-1821.85 ; U19.2@-1909.45,202.76 U19.2@-1905.51,206.69 ; v1@-1905.51,334.65 v1@-1893.7,334.65 ; C34.1@-1860.24,368.11 C34.1@-1860.24,374.02 ; U10.19@-1829.13,1642.72 -1752.95,1642.72 v1(-1742.13,1653.54) -1756.89,1668.31 U10.18@-1829.13,1668.31 ; U10.13@-1829.13,1796.26 -1761.78,1796.26 -1745.54,1812.5 v1(-1740.67,1812.5) ; v1(-1645.15,-1812.5) -1640.28,-1812.5 -1624.05,-1796.26 U7.13@-1556.69,-1796.26 ; U7.18@-1556.69,-1668.31 -1628.94,-1668.31 v1(-1643.7,-1653.54) -1632.87,-1642.72 U7.19@-1556.69,-1642.72 ; U10.9@-1556.69,1821.85 -1495.08,1821.85 v1(-1476.38,1840.55) ; v1(-1200.79,-1840.55) -1182.09,-1821.85 U6.9@-1120.47,-1821.85 ; U11.19@-1120.47,1642.72 -1044.29,1642.72 v1(-1033.46,1653.54) -1048.23,1668.31 U11.18@-1120.47,1668.31 ; U11.13@-1120.47,1796.26 -1053.12,1796.26 -1036.88,1812.5 v1(-1032.01,1812.5) ; v1(-936.49,-1812.5) -931.62,-1812.5 -915.39,-1796.26 U6.13@-848.03,-1796.26 ; U6.18@-848.03,-1668.31 -920.28,-1668.31 v1(-935.04,-1653.54) -924.21,-1642.72 U6.19@-848.03,-1642.72 ; U11.9@-848.03,1821.85 -786.42,1821.85 v1(-767.72,1840.55) ; v1(-492.13,-1840.55) -473.42,-1821.85 U5.9@-411.81,-1821.85 ; U12.19@-411.81,1642.72 -335.63,1642.72 v1(-324.8,1653.54) -339.57,1668.31 U12.18@-411.81,1668.31 ; U12.13@-411.81,1796.26 -344.46,1796.26 -328.22,1812.5 v1(-323.35,1812.5) ; v1(-227.83,-1812.5) -222.96,-1812.5 -206.72,-1796.26 U5.13@-139.37,-1796.26 ; U5.18@-139.37,-1668.31 -211.61,-1668.31 v1(-226.38,-1653.54) -215.55,-1642.72 U5.19@-139.37,-1642.72 ; U12.9@-139.37,1821.85 -77.76,1821.85 v1(-59.06,1840.55) ; v1(807.09,-1840.55) 825.79,-1821.85 U4.9@887.4,-1821.85 ; U13.19@887.4,1642.72 963.58,1642.72 v1(974.41,1653.54) 959.65,1668.31 U13.18@887.4,1668.31 ; U13.13@887.4,1796.26 954.76,1796.26 970.99,1812.5 v1(975.86,1812.5) ; v1(1071.38,-1812.5) 1076.25,-1812.5 1092.49,-1796.26 U4.13@1159.84,-1796.26 ; U4.18@1159.84,-1668.31 1087.6,-1668.31 v1(1072.84,-1653.54) 1083.66,-1642.72 U4.19@1159.84,-1642.72 ; U13.9@1159.84,1821.85 1221.46,1821.85 v1(1240.16,1840.55) ; v1(1515.75,-1840.55) 1534.45,-1821.85 U3.9@1596.06,-1821.85 ; U14.19@1596.06,1642.72 1672.24,1642.72 v1(1683.07,1653.54) 1668.31,1668.31 U14.18@1596.06,1668.31 ; U14.13@1596.06,1796.26 1663.42,1796.26 1679.65,1812.5 v1(1684.52,1812.5) ; v1(1780.04,-1812.5) 1784.91,-1812.5 1801.15,-1796.26 U3.13@1868.5,-1796.26 ; U3.18@1868.5,-1668.31 1796.26,-1668.31 v1(1781.5,-1653.54) 1792.32,-1642.72 U3.19@1868.5,-1642.72 ; U14.9@1868.5,1821.85 1930.12,1821.85 v1(1948.82,1840.55) ; v1(2224.41,-1840.55) 2243.11,-1821.85 U2.9@2304.72,-1821.85 ; U15.19@2304.72,1642.72 2380.91,1642.72 v1(2391.73,1653.54) 2376.97,1668.31 U15.18@2304.72,1668.31 ; U15.13@2304.72,1796.26 2372.08,1796.26 2388.31,1812.5 v1(2393.19,1812.5) ; v1(2488.7,-1812.5) 2493.58,-1812.5 2509.81,-1796.26 U2.13@2577.17,-1796.26 ; U2.18@2577.17,-1668.31 2504.92,-1668.31 v1(2490.16,-1653.54) 2500.98,-1642.72 U2.19@2577.17,-1642.72 ; U15.9@2577.17,1821.85 2638.78,1821.85 v1(2657.48,1840.55) ; v1(2933.07,-1840.55) 2951.77,-1821.85 U1.9@3013.39,-1821.85 ; U16.19@3013.39,1642.72 3089.57,1642.72 v1(3100.39,1653.54) 3085.63,1668.31 U16.18@3013.39,1668.31 ; U16.13@3013.39,1796.26 v1@3095.47,1796.26 ; v1(3197.37,-1812.5) 3202.24,-1812.5 3218.47,-1796.26 U1.13@3285.83,-1796.26 ; U1.18@3285.83,-1668.31 3213.58,-1668.31 v1(3198.82,-1653.54) 3209.65,-1642.72 U1.19@3285.83,-1642.72 ; U16.9@3285.83,1821.85 3347.44,1821.85 v1(3366.14,1840.55)
  Top Layer w18: R33.2@-167.32,1092.52 -165.35,1094.49 v1@-165.35,1122.05 ; U17.12@-71.26,507.87 -71.26,445.28 v1@-70.87,444.88 ; v1(196.85,858.27) 213.98,858.27 229.33,873.62 U21.7@252.33,873.62
  Top Layer w30: C36.1@-2490.16,374.02 v1(-2490.16,309.06) -2460.63,279.53 U18.2@-2460.63,200.74 ; C35.1@-1938.98,368.11 -1905.51,334.65 U19.2@-1905.51,206.69 ; v1@-1893.7,334.65 C34.1@-1860.24,368.11
  other v1: 705.11,-2298.63 1374.4,-2298.63 -2716.54,-2283.46 -2047.24,-2283.46 -1338.58,-2283.46 2086.61,-2283.46 2795.28,-2283.46 3464.57,-2283.46 -626.37,-2268.3 42.92,-2268.3 -2353.81,-1795.01 3307.09,-1456.69 -2716.54,-1377.95 3307.09,-787.4 -2716.54,-708.66 -1466.54,-688.98 3307.09,-118.11 -2185.04,-49.21 -2716.54,0 462.6,236.22 -2185.04,324.8 -1899.61,334.65 -71.12,443.23 3307.09,590.55 -344.49,639.76 -2731.7,712.21 -344.49,767.72 -2135.83,816.93 -809.21,865.08 -167.01,1123.39 354.33,1151.57 3291.92,1302.76 3101.85,1795.02 705.11,2268.3 1374.4,2268.3 -2716.54,2283.46 -2047.24,2283.46 -1338.58,2283.46 2086.61,2283.46 2795.28,2283.46 3464.57,2283.46 -626.37,2298.63 42.92,2298.63
LED1: H2.6 R37.1 | length 177
  Top Layer w12: R37.1@-1210.63,551.18 -1208.74,553.07 -1037.12,553.07 H2.6@-1035.24,554.95
LED2: H2.5 R36.1 | length 177.6
  Top Layer w12: R36.1@-1210.63,649.61 -1207.96,652.28 -1037.91,652.28 H2.5@-1035.24,654.95
LED3: H2.4 R35.1 | length 178.3
  Top Layer w12: R35.1@-1210.63,748.03 -1207.17,751.49 -1038.7,751.49 H2.4@-1035.24,754.95
LED4: H2.3 R34.1 | length 178.9
  Top Layer w12: R34.1@-1210.63,846.46 -1206.38,850.71 -1039.48,850.71 H2.3@-1035.24,854.95
NetD1_1: D1.1 R37.2 | length 250
  Top Layer w12: D1.1@-1519.68,551.18 R37.2@-1269.68,551.18
NetD2_1: D2.1 R36.2 | length 250
  Top Layer w12: D2.1@-1519.68,649.61 R36.2@-1269.68,649.61
NetD3_1: D3.1 R35.2 | length 250
  Top Layer w12: D3.1@-1519.68,748.03 R35.2@-1269.68,748.03
NetD4_1: D4.1 R34.2 | length 250
  Top Layer w12: D4.1@-1519.68,846.46 R34.2@-1269.68,846.46
NetD5_1: D5.1 R38.2 | length 118.1
  Top Layer w12: D5.1@-2533.46,551.18 R38.2@-2415.35,551.18
NetD6_1: D6.1 U22.6 | length 170.4
  Top Layer w12: U22.6@456.33,100 558.66,100 582.77,124.11 588.68,124.11 604.33,139.76 D6.1@604.33,145.67
NetP1_1: P1.1 U1.12 | length 421.4
  Top Layer w12: U1.12@3285.83,-1821.85 3349.41,-1821.85 3370.08,-1842.52 3370.08,-2151.57 P1.1@3356.3,-2165.35
NetP1_2: P1.2 U1.11 | length 359.9
  Top Layer w12: P1.2@3218.5,-2165.35 3224.41,-2159.45 3224.41,-1884.84 3261.81,-1847.44 U1.11@3285.83,-1847.44
NetP1_3: P1.3 U1.8 | length 453.8
  Top Layer w12: U1.8@3013.39,-1796.26 3079.72,-1796.26 3102.36,-1818.9 3102.36,-2133.86 3080.71,-2155.51 P1.3@3080.71,-2165.35
NetP1_4: P1.4 U1.10 | length 347.1
  Top Layer w12: P1.4@2942.91,-2165.35 3013.39,-2094.88 U1.10@3013.39,-1847.44
NetP2_1: P2.1 U2.12 | length 401.9
  Top Layer w12: U2.12@2577.17,-1821.85 2640.75,-1821.85 2661.42,-1842.52 P2.1@2661.42,-2151.57
NetP2_2: P2.2 U2.11 | length 327.5
  Top Layer w12: P2.2@2515.75,-2159.45 2515.75,-1884.84 U2.11@2553.15,-1847.44
NetP2_3: P2.3 U2.8 | length 443.9
  Top Layer w12: U2.8@2304.72,-1796.26 2371.06,-1796.26 2393.7,-1818.9 2393.7,-2133.86 P2.3@2372.05,-2155.51
NetP2_4: P2.4 U2.10 | length 347.1
  Top Layer w12: P2.4@2234.25,-2165.35 2304.72,-2094.88 U2.10@2304.72,-1847.44
NetP3_1: P3.1 U3.12 | length 401.9
  Top Layer w12: U3.12@1868.5,-1821.85 1932.09,-1821.85 1952.76,-1842.52 P3.1@1952.76,-2151.57
NetP3_2: P3.2 U3.11 | length 327.5
  Top Layer w12: P3.2@1807.09,-2159.45 1807.09,-1884.84 U3.11@1844.49,-1847.44
NetP3_3: P3.3 U3.8 | length 443.9
  Top Layer w12: U3.8@1596.06,-1796.26 1662.4,-1796.26 1685.04,-1818.9 1685.04,-2133.86 P3.3@1663.39,-2155.51
NetP3_4: P3.4 U3.10 | length 347.1
  Top Layer w12: P3.4@1525.59,-2165.35 1596.06,-2094.88 U3.10@1596.06,-1847.44
NetP4_1: P4.1 U4.12 | length 401.9
  Top Layer w12: U4.12@1159.84,-1821.85 1223.43,-1821.85 1244.09,-1842.52 P4.1@1244.09,-2151.57
NetP4_2: P4.2 U4.11 | length 327.5
  Top Layer w12: P4.2@1098.43,-2159.45 1098.43,-1884.84 U4.11@1135.83,-1847.44
NetP4_3: P4.3 U4.8 | length 443.9
  Top Layer w12: U4.8@887.4,-1796.26 953.74,-1796.26 976.38,-1818.9 976.38,-2133.86 P4.3@954.72,-2155.51